# EAGLE board PVTracker (EAGLE 7.7.0)
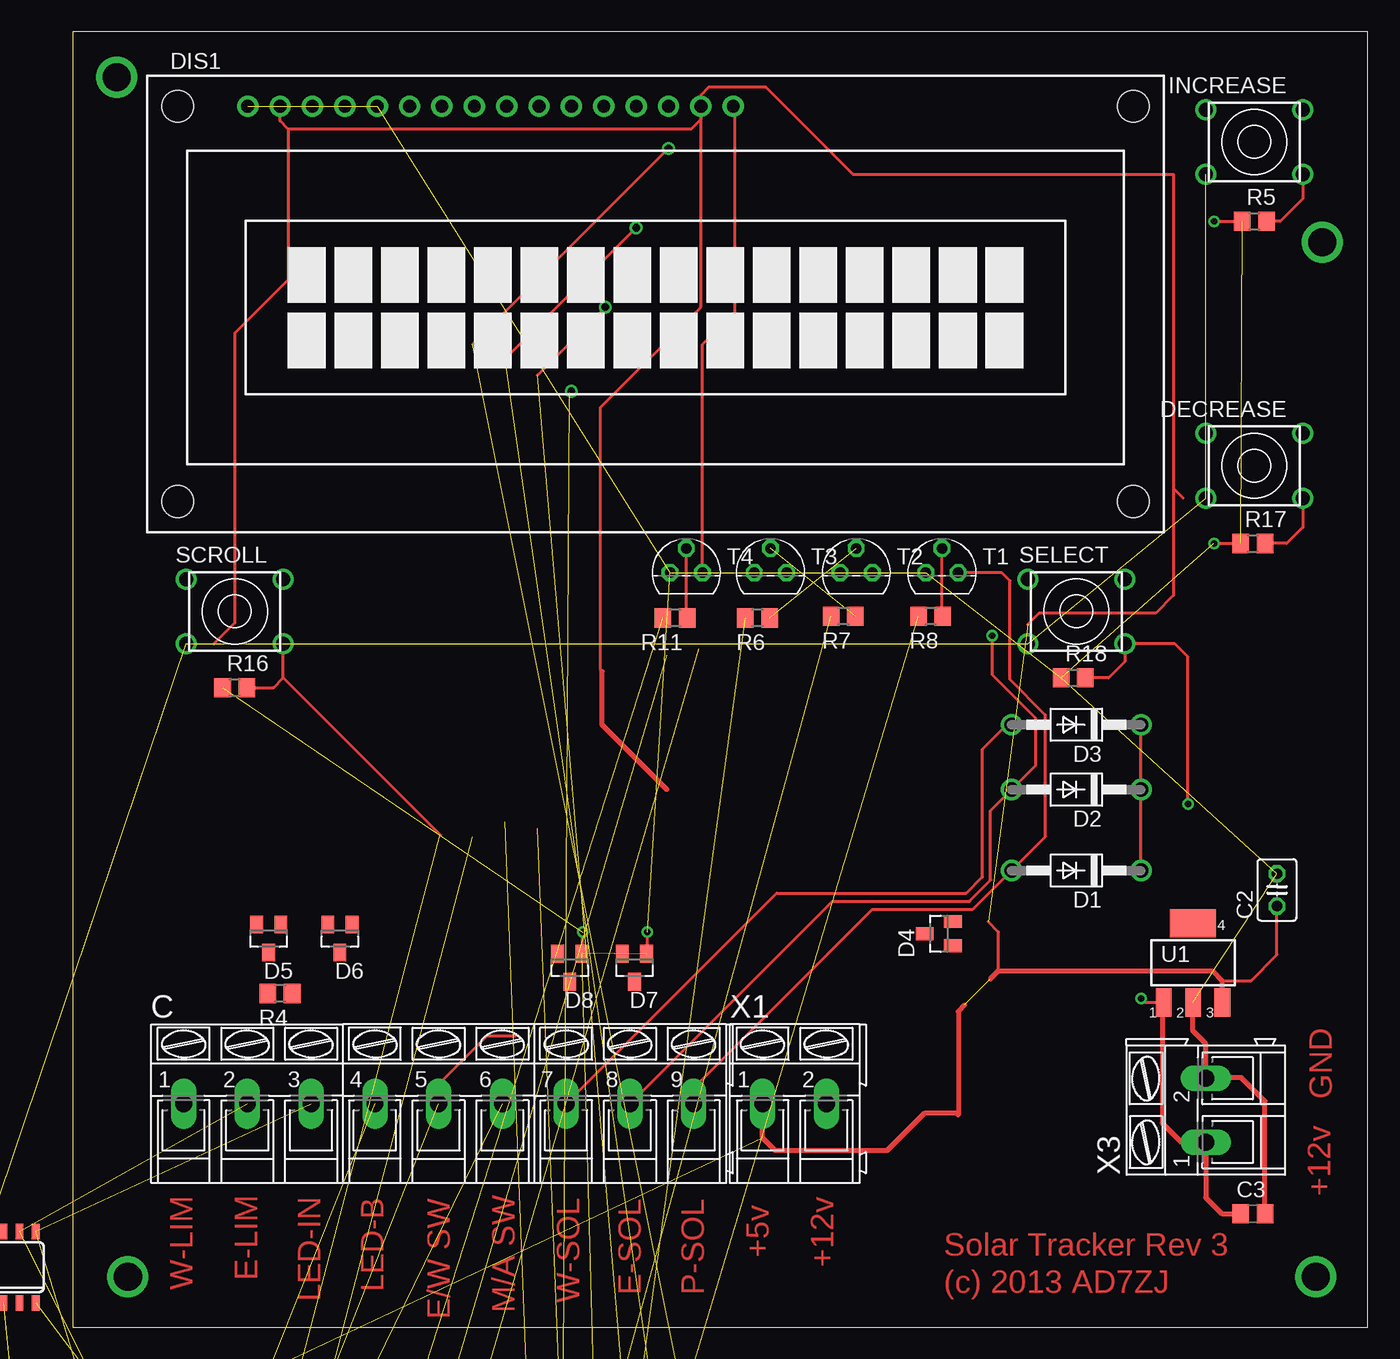
[diagram p0: board, top side]
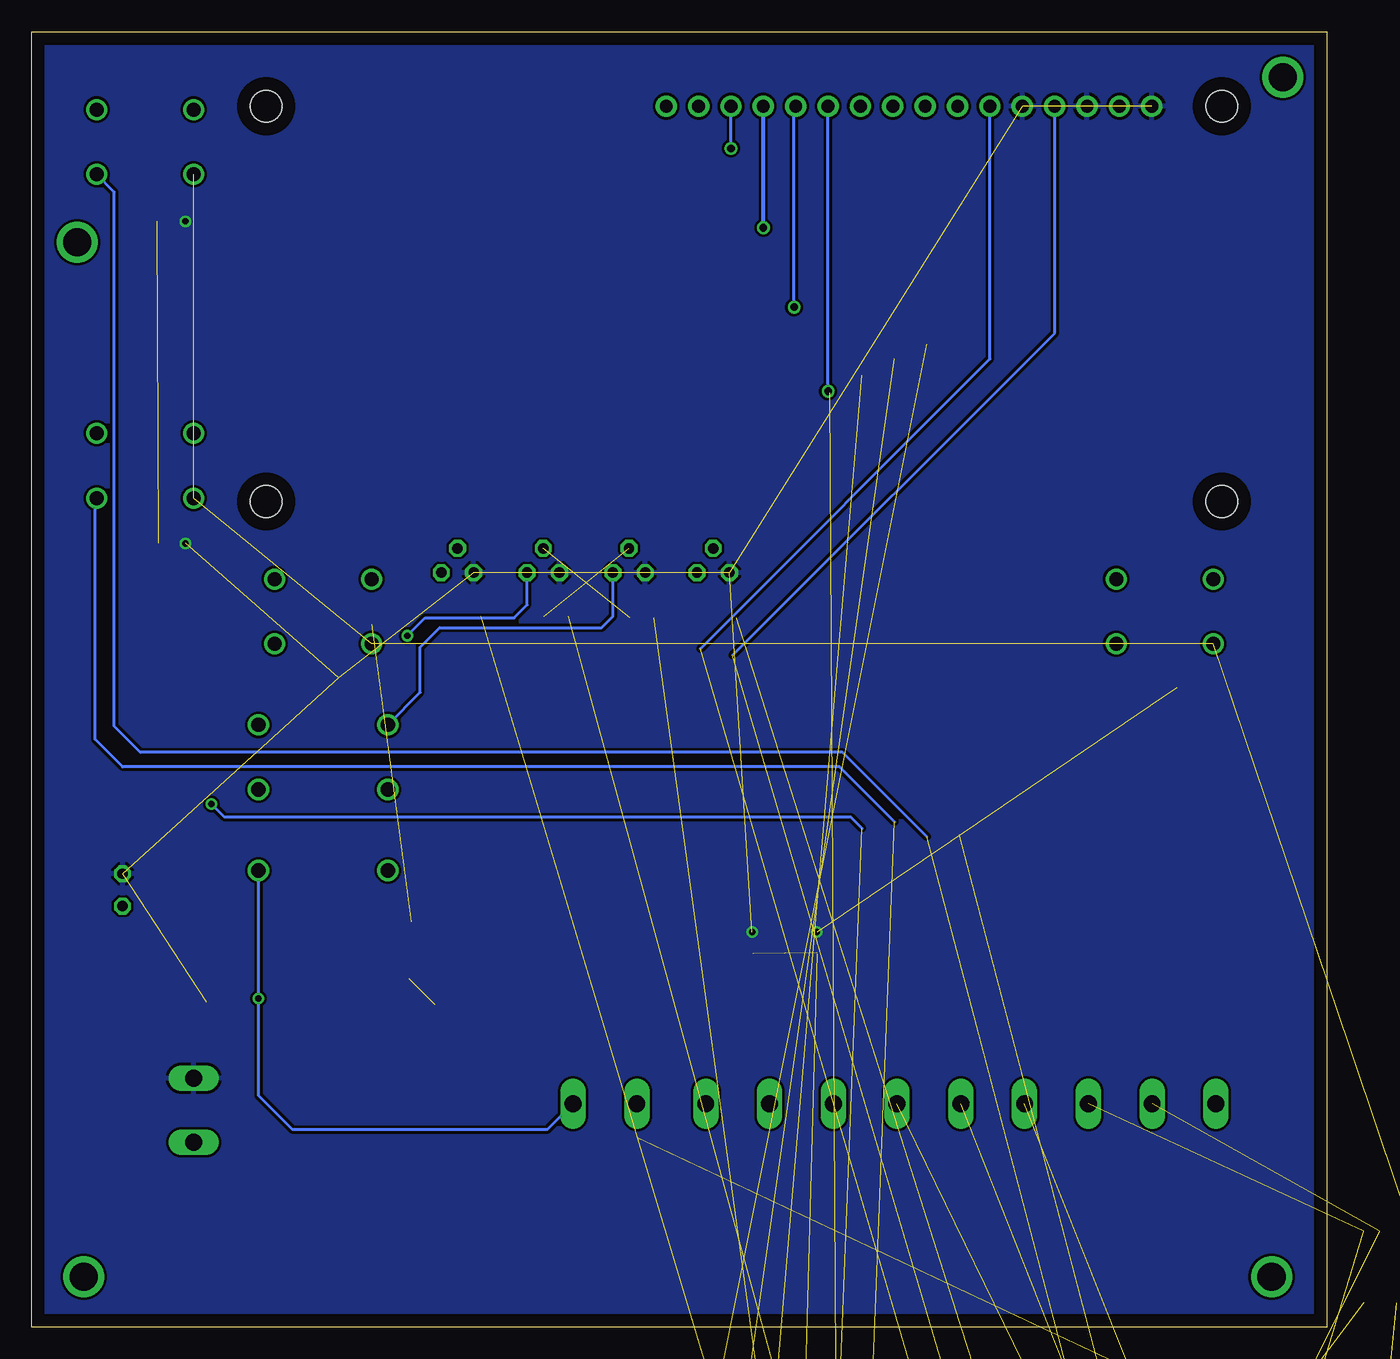
[diagram p1: board, bottom side, seen from below]

Size 101.6 x 101.6 mm. Coordinates in mm from the lower left corner, seen from the top.
Outline: 0,0 101.6,0 101.6,101.6 0,101.6 0,0
Copper layers (1*16): Top 0.035mm / dielectric 1.5mm / Bottom 0.035mm
Design rules "default *": minimum track width 10mil, minimum drill 24mil, track to track 8mil, track to pad 8mil, pad to pad 8mil, via to via 8mil, smd to smd 8mil, copper to edge 40mil, drill to drill 8mil, minimum pad ring 10mil, minimum via ring 8mil, stop-mask expansion 4mil, vias tented up to drill 0mil, thermal gap 10mil

## Footprints (pad centres in the part's own frame; a part is rotated, then mirrored left to right if it is on the bottom)
AK300/9 = drill 1.321 long: 1 -20.015,0; 2 -15.011,0; 3 -10.008,0; 4 -5.004,0; 5 0,0; 6 5.004,0; 7 10.008,0; 8 15.011,0; 9 20.015,0
C025-030X050 = drill 0.813 octagon: 1 -1.27,0; 2 1.27,0
C0805 = smd 1.3 x 1.5: 1 -0.95,0; 2 0.95,0
DO41-10 = drill 1.118: A 5.08,0; C -5.08,0
SOT-23 = smd 1 x 1.4: 1 -0.95,-1.1; 2 0.95,-1.1; 3 0,1.1
MYSWITCH = drill 1.1: A0 -3.81,-2.54; A1 -3.81,2.54; B0 3.81,-2.54; B1 3.81,2.54
TUXGR_16X2_R2 = drill 1 pad 1.676: 1 -32,15.5; 2 -29.46,15.5; 3 -26.92,15.5; 4 -24.38,15.5; 5 -21.84,15.5; 6 -19.3,15.5; 7 -16.76,15.5; 8 -14.22,15.5; 9 -11.68,15.5; 10 -9.14,15.5; 11 -6.6,15.5; 12 -4.06,15.5; 13 -1.52,15.5; 14 1.02,15.5; 15 3.56,15.5; 16 6.1,15.5 | hole 2.5: -37.5,-15.5; 37.5,-15.5; -37.5,15.5; 37.5,15.5
R0805 = smd 1.3 x 1.5: 1 -0.95,0; 2 0.95,0
TO92 = drill 0.813 octagon: 1 1.27,0; 2 0,1.905; 3 -1.27,0
SOT-223 = smd 1.219 x 2.235: 1 -2.311,-3.099; 2 0,-3.099; 3 2.311,-3.099 | smd 3.6 x 2.2: 4 0,3.099
SO08-0.15 = smd 0.6 x 1.2: 1 -1.905,-2.8; 2 -0.635,-2.8; 3 0.635,-2.8; 4 1.905,-2.8; 5 1.905,2.8; 6 0.635,2.8; 7 -0.635,2.8; 8 -1.905,2.8
RASPBERRYPI_BASTELSTUBE_V13_RASPI_BOARD_B+_FULL = drill 1 pad 1.778 square: 1 8.37,25.23 | drill 1 pad 1.778: 2 8.37,27.77; 3 10.91,25.23; 4 10.91,27.77; 5 13.45,25.23; 6 13.45,27.77; 7 15.99,25.23; 8 15.99,27.77; 9 18.53,25.23; 10 18.53,27.77; 11 21.07,25.23; 12 21.07,27.77; 13 23.61,25.23; 14 23.61,27.77; 15 26.15,25.23; 16 26.15,27.77; 17 28.69,25.23; 18 28.69,27.77; 19 31.23,25.23; 20 31.23,27.77; 21 33.77,25.23; 22 33.77,27.77; 23 36.31,25.23; 24 36.31,27.77; 25 38.85,25.23; 26 38.85,27.77; 27 41.39,25.23; 28 41.39,27.77; 29 43.93,25.23; 30 43.93,27.77; 31 46.47,25.23; 32 46.47,27.77; 33 49.01,25.23; 34 49.01,27.77; 35 51.55,25.23; 36 51.55,27.77; 37 54.09,25.23; 38 54.09,27.77; 39 56.63,25.23; 40 56.63,27.77 | hole 2.75: 3.5,3.5; 3.5,26.5; 61.5,3.5; 61.5,26.5
AK300/2 = drill 1.321 long: 1 -2.515,0; 2 2.489,0
CRYSTAL-PTH-2X6-CYL = drill 0.813 pad 1.676: 1 -1.27,0; 2 1.27,0

## Placement (x,y rotation side)
C  [AK300/9]  28.7,17.53 0 top
C2  47uF  [C025-030X050]  94.49,34.29 90 top
C3  .47uF  [C0805]  92.58,8.89 0 top
D1  1N4004  [DO41-10]  78.74,35.81 180 top
D2  1N4004  [DO41-10]  78.74,42.16 180 top
D3  1N4004  [DO41-10]  78.74,47.24 180 top
D4  NUP1301  [SOT-23]  67.94,30.86 90 top
D5  NUP1301  [SOT-23]  15.37,30.48 180 top
D6  NUP1301  [SOT-23]  20.95,30.48 180 top
D7  NUP1301  [SOT-23]  44.07,28.19 180 top
D8  NUP1301  [SOT-23]  38.99,28.19 180 top
DECREASE  MYSWITCH  [MYSWITCH]  92.71,67.56 0 top
DIS1  TUXGR_16X2_R2  [TUXGR_16X2_R2]  45.72,80.26 0 top
INCREASE  MYSWITCH  [MYSWITCH]  92.71,92.96 0 top
R4  10k  [R0805]  16.26,26.16 180 top
R5  10k  [R0805]  92.71,86.74 0 top
R6  1k  [R0805]  53.72,55.63 180 top
R7  1k  [R0805]  60.45,55.75 180 top
R8  1k  [R0805]  67.31,55.75 180 top
R11  2k  [R0805]  47.24,55.63 180 top
R16  10k  [R0805]  12.7,50.16 0 top
R17  10k  [R0805]  92.58,61.47 0 top
R18  10k  [R0805]  78.49,50.93 0 top
SCROLL  MYSWITCH  [MYSWITCH]  12.7,56.13 0 top
SELECT  MYSWITCH  [MYSWITCH]  78.74,56.13 0 top
T1  2N3565  [TO92]  68.2,59.18 0 top
T2  2N3565  [TO92]  61.47,59.18 0 top
T3  2N3565  [TO92]  54.74,59.18 0 top
T4  2N3565  [TO92]  48.13,59.18 0 top
U1  LM2940  [SOT-223]  87.88,28.57 0 top
U2  DS1307Z  [SO08-0.15]  -4.83,4.7 0 top
U$1  RPI-ZERO  [RASPBERRYPI_BASTELSTUBE_V13_RASPI_BOARD_B+_FULL]  -8,-36.96 0 top  (outside the outline)
X1  [AK300/2]  56.64,17.53 0 top
X3  [AK300/2]  88.9,17.02 90 top
Y1  32.768kHz  [CRYSTAL-PTH-2X6-CYL]  0.64,-46.35 0 top  (outside the outline)

## Library data of the parts
C X1 X3 = con-ptr500; OC_FARNELL: unknown; OC_NEWARK: unknown
C2 = resistor
C3 R4-R8 R11 R16-R18 = rcl
D1-D3 = diode
D4-D8 U1 = custom_Elijah
DECREASE INCREASE SCROLL SELECT = switch
DIS1 = display-lcd; OC_FARNELL: unknown; OC_NEWARK: unknown
T1-T4 = transistor
U2 = SparkFun-Clocks; PROD_ID: IC-08138
U$1 = RPI-Zero
Y1 = SparkFun-Clocks; PROD_ID: XTAL-10112

## Nets
3V3@1: U$1.1
5V0@1: C2.1 DIS1.2 DIS1.15 U1.3 U$1.2 U$1.4 X1.1
GND: C2.2 C3.2 D7.1 D8.1 DIS1.1 DIS1.3 DIS1.5 R5.1 R16.1 R17.1 R18.1 T1.3 T2.3 T3.3 T4.3 U1.2 U2.4 U$1.6 U$1.9 U$1.14 U$1.20 U$1.25 U$1.30 U$1.34 U$1.39 X3.2
N$1: R11.2 U$1.22
N$2: C.5 U$1.16
N$3: DIS1.4 U$1.24
N$4: DIS1.6 U$1.26
N$5: DIS1.11 U$1.32
N$6: DIS1.12 U$1.36
N$7: DIS1.13 U$1.38
N$8: DIS1.14 U$1.40
N$9: R7.2 U$1.33
N$10: R6.2 U$1.35
N$11: R6.1 T2.2
N$12: C.9 D1.A T1.1
N$13: C.8 D2.A T2.1
N$14: C.7 D3.A T3.1
N$15: C3.1 D1.C D2.C D3.C U1.1 X1.2 X3.1
N$16: R7.1 T3.2
N$17: R8.2 U$1.37
N$18: C.4 U$1.12
N$19: U2.2 Y1.1
N$20: R11.1 T4.2
N$21: C.6 U$1.18
N$22: U2.1 Y1.2
N$25: DIS1.16 T4.1
N$26: R16.2 SCROLL.B0 U$1.13
N$27: INCREASE.B0 R5.2 U$1.15
N$28: DECREASE.B0 R17.2 U$1.29
N$29: R18.2 SELECT.B0 U$1.31
N$30: R8.1 T1.2
SCL: C.2 U2.6 U$1.5
SDA: C.3 U2.5 U$1.3
VCC_1: DECREASE.A0 INCREASE.A0 SCROLL.A0 SELECT.A0 U2.8

## Tracks (layer width: path | path; a pad name or v marks a point on that pad's centre or on a via)
5V0@1  (4 unrouted)
  Top 0.254: 71.82,31.81 72.64,30.99 72.64,27.94 | DIS1.15 49.28,80.01 41.4,72.14 41.4,51.56 41.53,51.44 | DIS1.15 49.28,94.75 48.51,93.98 16.89,93.98 | 16.89,93.98 16.26,94.61 DIS1.2 | 11.05,53.59 12.7,55.24 12.7,77.98 16.89,82.17 16.89,93.98 | DIS1.15 49.28,96.65 49.91,97.28 54.36,97.28 61.21,90.42 86.36,90.42 86.36,65.79 | 86.36,65.79 87.12,65.02 | 74.93,55.12 75.82,56.01 84.96,56.01 86.36,57.4 86.36,65.79 | C2.1 94.49,29.21 92.46,27.18 90.17,27.18
  Top 0.406: U1.3 90.17,25.5 90.17,27.18 89.41,27.94 72.64,27.94 72.01,27.3 | 69.98,25.27 69.47,24.77 69.47,16.64 69.34,16.76 66.8,16.76 63.88,13.84 55.12,13.84 54.13,14.83 X1.1 | 46.61,42.16 41.53,47.24 41.53,51.44
GND  (via drill 0.5)  (23 unrouted)
  Top 0.254: v40.01,30.99 40.01,29.36 D8.1 | v45.09,30.99 45.09,29.36 D7.1 | 88.95,19.56 X3.2 | v89.53,61.47 R17.1 | v89.53,86.74 R5.1
  Top 0.406: X3.2 88.9,22.23 87.88,23.24 U1.2 | C3.2 93.53,17.72 91.69,19.56 88.95,19.56
  pour Bottom: 0,0 0,101.6 101.6,101.6 101.6,0
N$1  (1 unrouted)
N$2  (1 unrouted)
  Top 0.254: C.5 28.7,19.05 32.51,22.86 34.76,22.86
N$3  (1 unrouted)
  Bottom 0.254: DIS1.4 21.34,77.98 46.61,52.71
N$4  (1 unrouted)
  Bottom 0.254: DIS1.6 26.42,75.95 49.15,53.22
N$5  (via drill 0.6)  (1 unrouted)
  Top 0.254: 38.99,73.28 v39.12,73.41
  Bottom 0.254: v39.12,73.41 DIS1.11
  Bottom 0.406: DIS1.11
N$6  (via drill 0.6)  (1 unrouted)
  Top 0.254: 36.45,74.68 v41.78,80.01
  Bottom 0.254: v41.78,80.01 41.78,95.64
  Bottom 0.406: 41.78,95.64 DIS1.12
N$7  (via drill 0.6)  (1 unrouted)
  Top 0.254: 33.91,75.95 v44.2,86.23
  Bottom 0.305: v44.2,86.23 DIS1.13
  Bottom 0.406: DIS1.13
N$8  (via drill 0.6)  (1 unrouted)
  Top 0.254: 31.37,77.09 v46.74,92.46
  Bottom 0.254: v46.74,92.46 DIS1.14
  Bottom 0.406: DIS1.14
N$9  (1 unrouted)
N$10  (1 unrouted)
N$11  (1 unrouted)
N$12
  Top 0.254: C.9 48.72,18.75 62.74,32.77 70.61,32.77 D1.A 76.33,38.48 76.33,48.01 73.53,50.8 73.53,58.55 72.9,59.18 T1.1
N$13  (via drill 0.5)
  Top 0.254: C.8 59.59,33.4 70.36,33.4 72.01,35.05 72.01,40.51 D2.A 75.56,44.07 75.56,47.75 72.14,51.18 v72.14,54.23
  Bottom 0.254: T2.1 62.74,56.64 63.75,55.63 70.74,55.63 v72.14,54.23
N$14
  Top 0.254: C.7 55.22,34.04 70.1,34.04 71.37,35.31 71.37,45.34 73.28,47.24 D3.A
  Bottom 0.254: T3.1 56.01,55.75 56.9,54.86 69.6,54.86 71.12,53.34 71.12,49.78 D3.A
N$15  (via drill 0.5)
  Top 0.254: U1.1 84.12,25.48 v83.82,25.78 | D1.C D2.C D3.C
  Top 0.406: U1.1 85.47,25.38 85.47,16 86.97,14.5 X3.1 88.9,10.16 90.17,8.89 C3.1
  Bottom 0.254: D1.C v83.82,25.78 83.82,18.16 81.15,15.49 61.16,15.49 X1.2
N$16  (1 unrouted)
N$17  (1 unrouted)
N$18  (1 unrouted)
N$19  (1 unrouted)
N$20
  Top 0.254: T4.2 48.13,55.69 R11.1
N$21  (1 unrouted)
  Top 0.254: C.6 34.5,17.53
N$22  (1 unrouted)
N$25
  Top 0.254: T4.1 49.4,77.09 51.94,79.63 51.94,95.64 DIS1.16
N$26  (1 unrouted)
  Top 0.254: 16.51,50.93 SCROLL.B0 | 16.51,50.93 15.75,50.16 R16.2 | 16.51,50.93 28.83,38.61
N$27  (1 unrouted)
  Top 0.254: R5.2 94.74,86.74 96.52,88.52 INCREASE.B0
  Bottom 0.254: 31.37,38.48 37.97,45.09 93.09,45.09 95.12,47.12 95.12,89.03 INCREASE.B0
N$28  (1 unrouted)
  Top 0.254: DECREASE.B0 96.52,62.74 95.25,61.47 R17.2
  Bottom 0.254: 33.91,39.62 38.23,43.94 94.49,43.94 96.65,46.1 96.65,64.9 DECREASE.B0
N$29  (via drill 0.5)  (1 unrouted)
  Top 0.254: R18.2 81.28,50.93 82.55,52.2 SELECT.B0 86.49,53.59 87.5,52.58 v87.5,41.02
  Bottom 0.254: 36.45,39.12 37.34,40.01 86.49,40.01 v87.5,41.02
N$30
  Top 0.254: T1.2 68.2,55.81 R8.1
N$36  (via drill 2.2)
  other vias: 98.04,85.09
N$37  (via drill 2.2)
  other vias: 97.54,3.94
N$38  (via drill 2.2)
  other vias: 4.32,3.94
N$39  (via drill 2.2)
  other vias: 3.43,98.04
SCL  (2 unrouted)
SDA  (2 unrouted)
VCC_1  (4 unrouted)

## Text on the board
Top: GND | +12v | Solar Tracker Rev 3 | +5v | +12v | E-LIM | W-LIM | LED-B | E-SOL | P-SOL | (c) 2013 AD7ZJ | LED-IN | W-SOL | E/W SW | M/A SW